# Altium PCB Lab11.PcbDoc
Units mil, origin at the board's own origin, x right, y up, seen from the top; angles counter-clockwise.
Board outline 5400 x 3700 mil, 2 copper layers (Top Layer, Top, Bottom Layer, Bottom); 13 components, 9 nets, 27 pads, 0 vias.
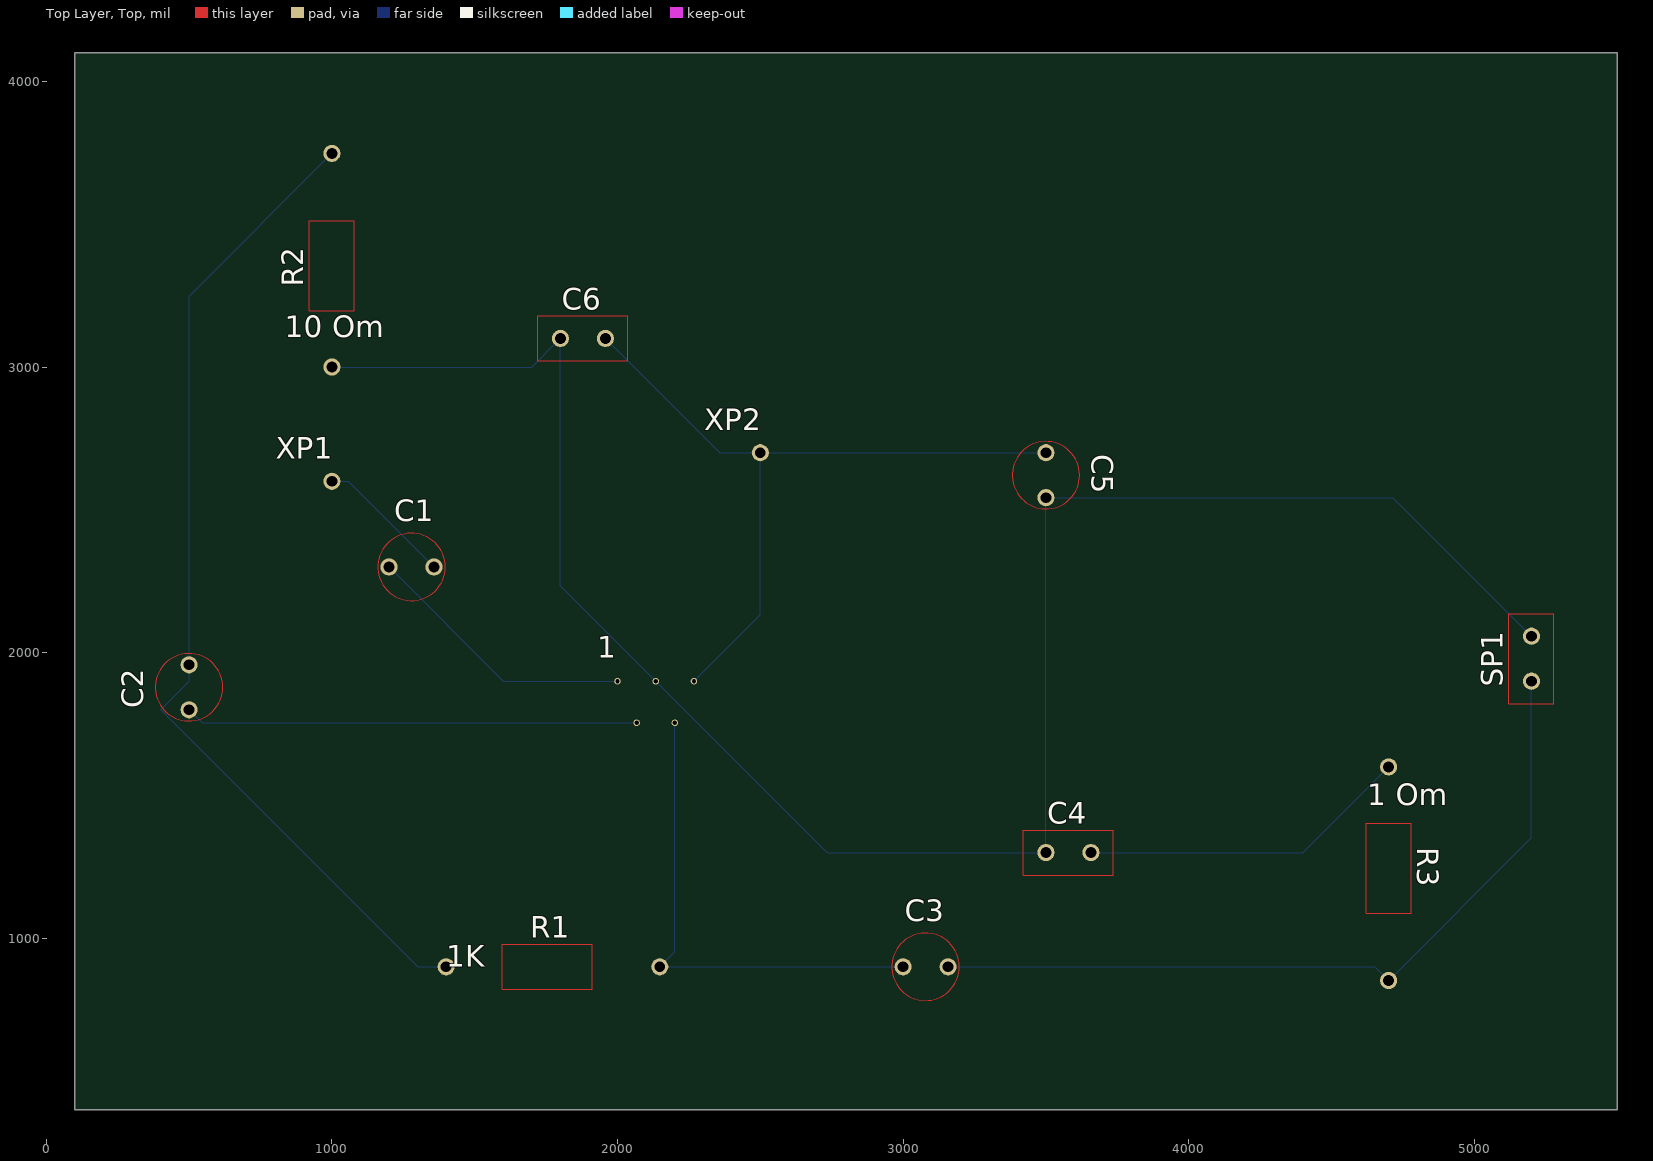
[diagram p0: Top Layer, Top view]
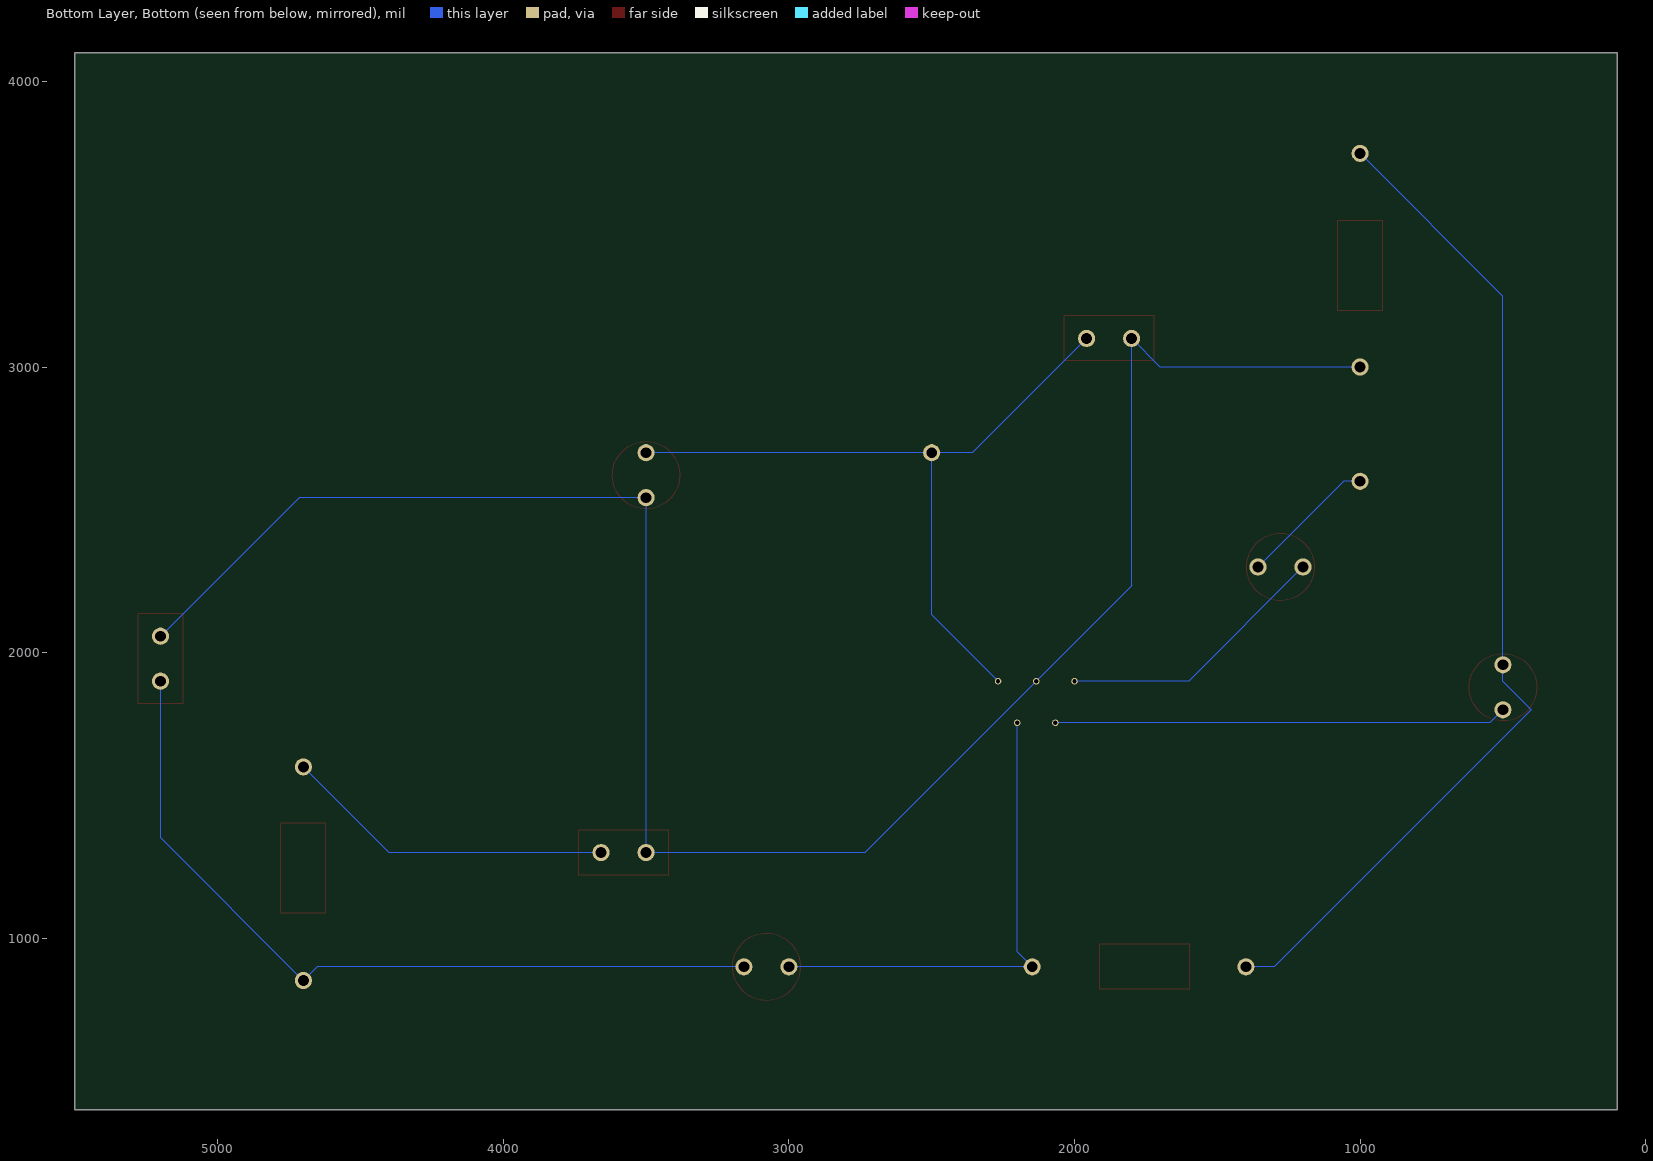
[diagram p1: Bottom Layer, Bottom view, seen from below]

## Layer stack, top to bottom
Top Solder, Top Mask: solder mask 0.4, Solder Resist, Dk 3.5
Top Layer, Top: signal copper 1.4
Dielectric 1: dielectric 12.6, FR-4, Dk 4.8
Bottom Layer, Bottom: signal copper 1.4
Bottom Solder, Bot Mask: solder mask 0.4, Solder Resist, Dk 3.5

## Board outline
100,400 5500,400 5500,4100 100,4100

## Design rules (kind name [scope] priority, off if disabled: settings)
Clearance [All] p1: gap=10 ignorepadtopadclearanceinfootprint=FALSE except(0: Arc-Hole Track-Hole SMDPad-Hole THPad-Hole Via-Hole Fill-Hole Poly-Hole Region-Hole Text-Hole; 11.81: Arc-Arc Arc-Track Arc-THPad Arc-Via Track-Track Track-THPad Track-Via THPad-THPad THPad-Via Via-Via)
PlaneClearance [All] p1: clearance=10
PolygonConnect [All] p1: connectstyle=Relief reliefconductorwidth=10 reliefentries=4 polygonreliefangle="90 Angle" airgapwidth=10
RoomDefinition [All] p1: confinementstyle=ConfineIn formatcopy=TRUE lockcomponents=FALSE outline 100,400 5500,400 5500,4100 100,4100
RoutingVias [All] p1: holewidth=28 width=50 viastyle="Through Hole" minholewidth=28 minwidth=50 maxholewidth=28 maxwidth=50
SolderMaskExpansion [All] p1: expansion=4 istentingtop=FALSE
Width [All] p1: maxlimit=10 minlimit=10 preferedwidth=10
29 further rules are at their usual default settings.

## Components (designator, comment, footprint, x,y, rotation, side; value= is the part's Value field where it differs from the comment)
1 "" TDA2003 2000,1900 r0 top
C1 "10mF 16V" CAP2 1200,2300 r0 top
C2 "100mF 16V" CAP2 500,1800 r90 top
C3 "470mF 16V" CAP2 3000,900 r0 top
C4 "0.1mF" CAP1 3500,1300 r0 top
C5 "100mF 16V" CAP2 3500,2700 r270 top
C6 "0.1mF" CAP1 1800,3100 r0 top
R1 "1K" RES 1400,900 r0 top
R2 "10 Om" RES 1000,3000 r90 top
R3 "1 Om" RES 4700,1600 r270 top
SP1 "" CAP1 5200,1900 r90 top
XP1 "IN" 1PAD 1000,2600 r0 top
XP2 "+12V" 1PAD 2500,2700 r0 top

## Footprints (in the part's own frame and the unit in brackets; to place one, negate y for a bottom-side part, rotate by r counter-clockwise, add the part's x,y. Pads: shape width x height; smd on the part's side, far side on the other; paste and mask are expansions set on the pad)
1PAD [mil]
  round 60 hole 38: 1(0,0)
CAP1 [mil]
  round 60 hole 38: 1(0,0) 2(157.48,0)
  Top Layer, Top lines w3.94: -78.74,-78.74 236.22,-78.74 236.22,78.74 -78.74,78.74 -78.74,-78.74
CAP2 [mil]
  round 60 hole 38: 1(0,0) 2(157.48,0)
  Top Layer, Top circle w3.94: c78.74,0 r118.11
RES [mil]
  round 60 hole 38: 1(0,0) 2(748.03,0)
  Top Layer, Top lines w3.94: 196.85,-78.74 511.81,-78.74 511.81,78.74 196.85,78.74 196.85,-78.74
TDA2003 [mm]
  round 0.58 hole 0.38: 1(0,0) 2(1.7,-3.7) 3(3.4,0) 4(5.1,-3.7) 5(6.8,0)

## Nets (pads, with @x,y where several pads share a name; then routed paths per layer and width w, separated by ;. In a path a pad name is that pad's centre, name@x,y a point inside that pad or via, vN(x,y) a via of type N, cw(c..) or ccw(c..) an arc to the next point about the centre after c; other vN are vias at no path point)
1: 1.3 C4.1 C5.2 C6.1 R2.1 SP1.2 | length 6937.8
  Bottom Layer, Bottom w3.94: R2.1 1700,3000 C6.1 1800,2233.86 1.3 2733.86,1300 C4.1 C5.2 4714.96,2542.52 SP1.2
NET00000: C2.2 R1.1 R2.2 | length 3569.4
  Bottom Layer, Bottom w3.94: R2.2 500,3248.03 C2.2 500,1900 400,1800 1300,900 R1.1
NET00001: 1.4 C3.1 R1.2 | length 1728.2
  Bottom Layer, Bottom w3.94: 1.4 2200.79,952.76 R1.2 C3.1
NET00002: C3.2 R3.2 SP1.1 | length 2817.6
  Bottom Layer, Bottom w3.94: C3.2 4651.97,900 R3.2 5200,1351.97 SP1.1
NET00003: C4.2 R3.1 | length 1166.8
  Bottom Layer, Bottom w3.94: C4.2 4400,1300 R3.1
NET00004: 1.2 C2.1 | length 1585.8
  Bottom Layer, Bottom w3.94: C2.1 545.67,1754.33 1.2
NET00005: 1.1 C1.1 | length 965.7
  Bottom Layer, Bottom w3.94: C1.1 1600,1900 1.1
NET00007: C1.2 XP1.1 | length 481.7
  Bottom Layer, Bottom w3.94: XP1.1 1057.48,2600 C1.2
NET00008: 1.5 C5.1 C6.2 XP2.1 | length 2604.4
  Bottom Layer, Bottom w3.94: C6.2 2357.48,2700 XP2.1 ; 1.5 2500,2132.28 XP2.1 ; C5.1 XP2.1